# Altium PCB mpll31.PcbDoc (part 3 of 4)
Units mil, origin at the board's own origin, x right, y up, seen from the top; angles counter-clockwise.
Board outline 3925 x 3925 mil, 2 copper layers (TopLayer, BottomLayer); 92 components, 107 nets, 905 pads, 24 vias.
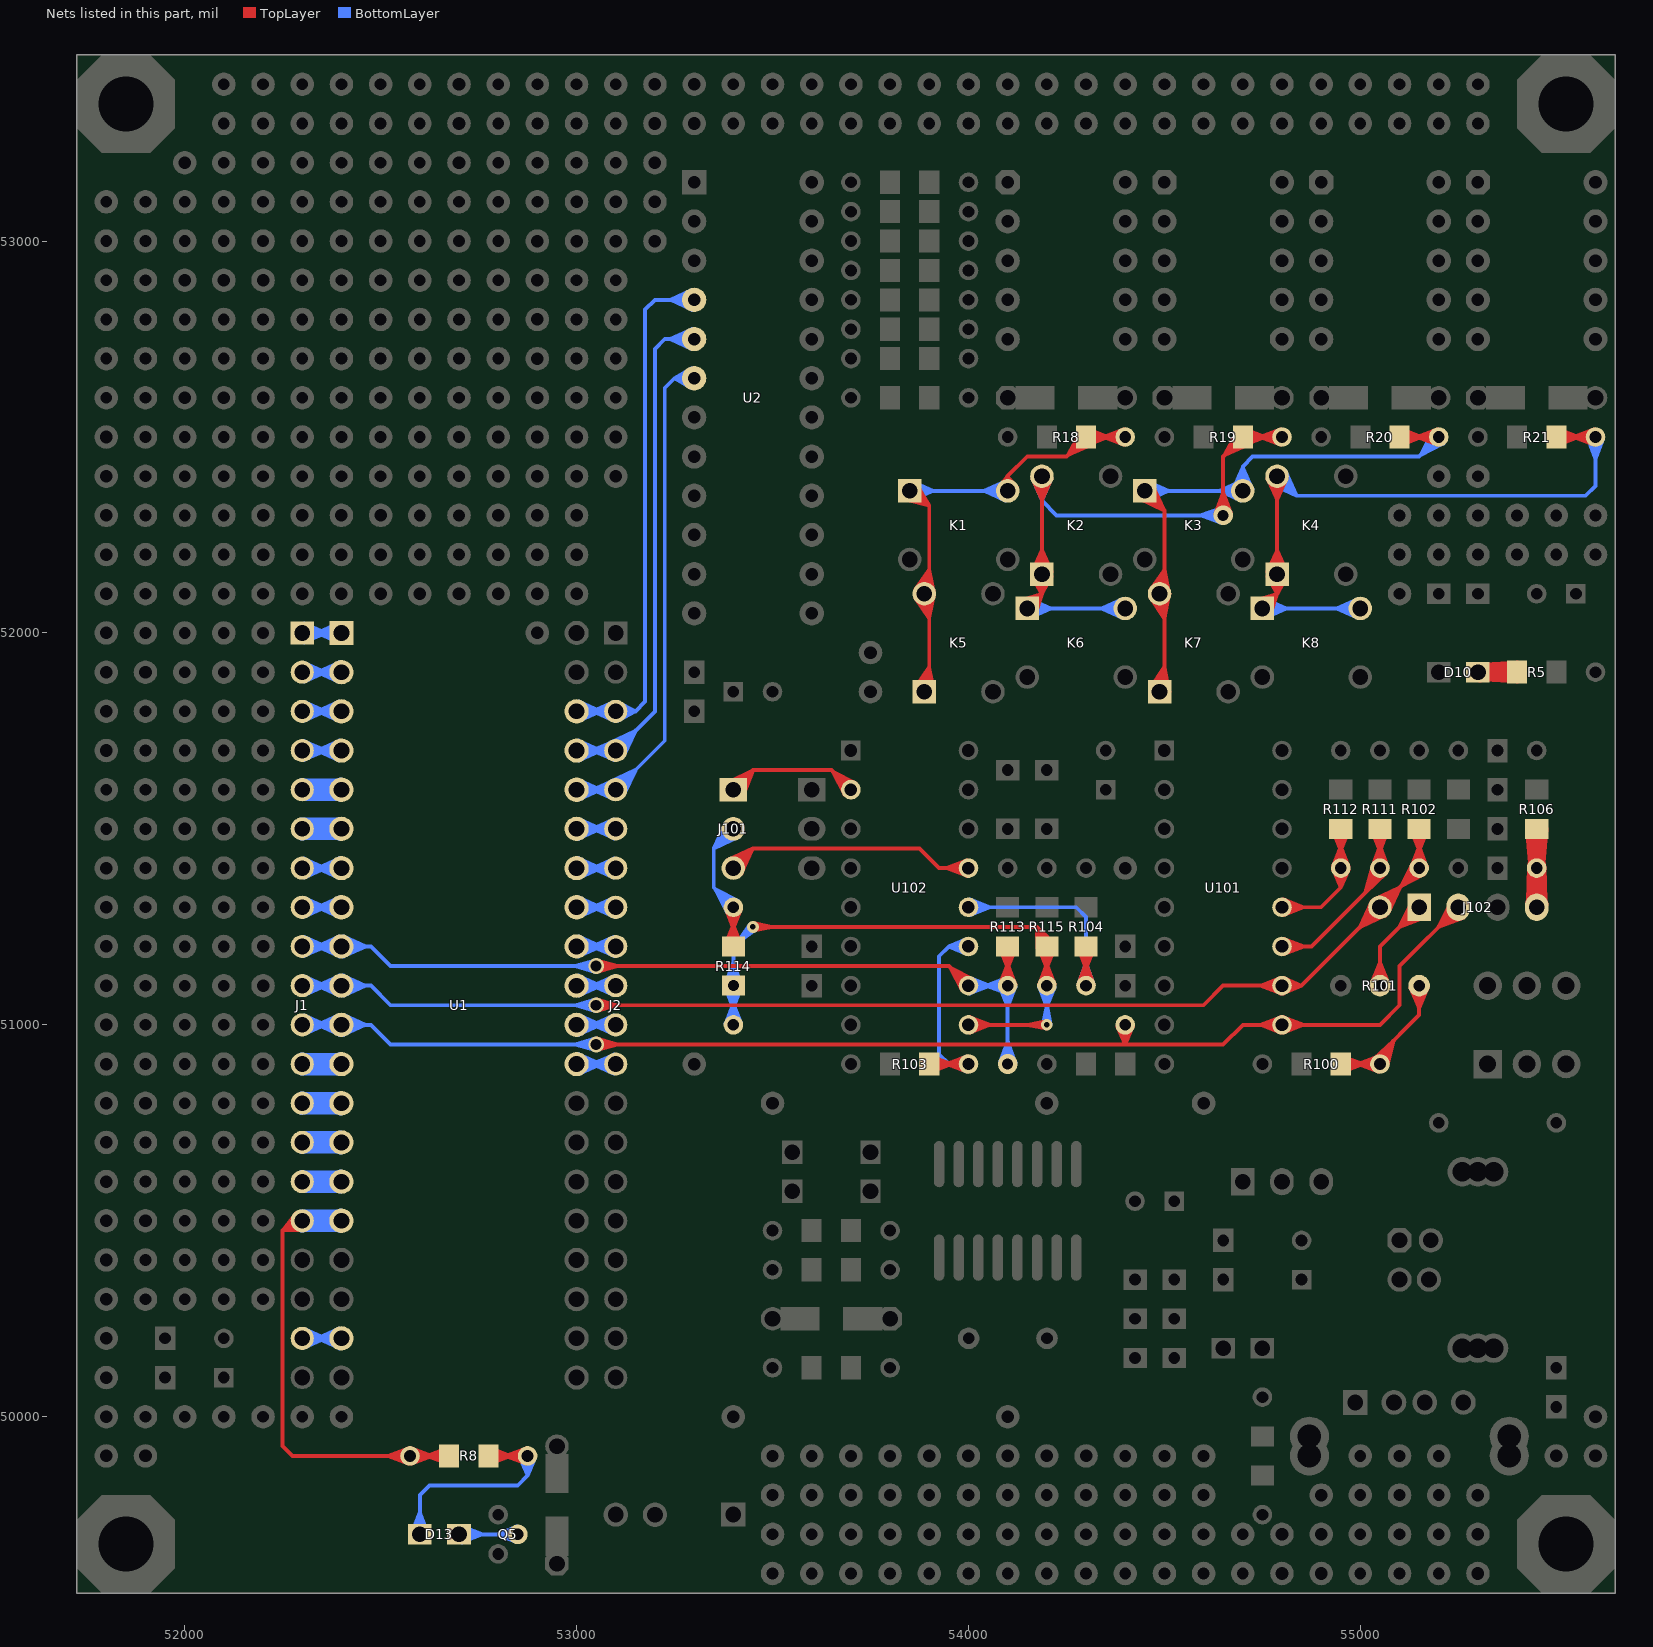
[diagram p3: the nets of this part, all layers, seen from the top]

## Via types
v1: diameter 50, hole 28, TopLayer to BottomLayer, 12 vias
v2: diameter 30, hole 14, TopLayer to BottomLayer, 8 vias
v3: diameter 40, hole 28, TopLayer to BottomLayer, 4 vias

## Nets (pads, with @x,y where several pads share a name; then routed paths per layer and width w, separated by ;. In a path a pad name is that pad's centre, name@x,y a point inside that pad or via, vN(x,y) a via of type N, cw(c..) or ccw(c..) an arc to the next point about the centre after c; other vN are vias at no path point) (continued)
NetD10_2: D10.2 R5.2 R5.4 | length 5082.1
  TopLayer w20: D10.2@55301.24,51885.05 R5.4@55389.2,51899.85 ; D10.2@55301.24,51914.95 R5.4@55389.2,51900.15 ; D10.2@55304,51900 R5.4@55390,51900 ; D10.2@55305.49,51884.07 R5.4@55390,51900 ; D10.2@55305.49,51915.93 R5.4@55390,51900 ; R5.4@55396.74,51888.69 D10.2@55315.14,51914.11 ; R5.4@55396.74,51911.31 D10.2@55315.14,51885.89 ; R5.4@55400.44,51880.48 D10.2@55315.14,51885.89 ; R5.4@55400.44,51919.52 D10.2@55315.14,51914.11 ; D10.2@55300,51900 R5.4@55389.2,51900.15 ; D10.2@55300,51900 R5.4@55385,51900 ; D10.2@55300,51900 R5.4@55389.2,51899.85 ; D10.2@55300,51900 R5.4@55400,51900 ; D10.2@55301.29,51885.06 R5.4@55389.2,51900.15 ; D10.2@55301.32,51885.06 R5.4@55385,51900 ; D10.2@55301.32,51885.06 R5.4@55385,51900 ; D10.2@55301.32,51914.94 R5.4@55385,51900 ; D10.2@55301.29,51914.94 R5.4@55389.2,51899.85 ; D10.2@55301.32,51914.94 R5.4@55385,51900 ; D10.2@55314.41,51900 R5.4@55400,51900 ; D10.2@55314.41,51900 R5.4@55398.58,51915.53 ; D10.2@55314.41,51900 R5.4@55398.58,51884.47 ; D10.2@55314.41,51900 R5.4@55398.58,51915.53 ; D10.2@55314.41,51900 R5.4@55398.58,51884.47 ; D10.2@55314.41,51900.02 R5.4@55400,51900 ; D10.2@55314.41,51900.02 R5.4@55398.58,51915.53 ; D10.2@55314.41,51900.02 R5.4@55398.58,51884.47 ; D10.2@55314.41,51900 R5.4@55400,51900 ; D10.2@55314.41,51900 R5.4@55398.58,51915.53 ; D10.2@55314.41,51900 R5.4@55398.58,51884.47 ; D10.2@55314.41,51899.98 R5.4@55400,51900 ; D10.2@55314.41,51899.98 R5.4@55398.58,51915.53 ; D10.2@55314.41,51899.98 R5.4@55398.58,51884.47 ; D10.2@55314.83,51887.47 R5.4@55400,51896.06 ; D10.2@55314.83,51887.47 55397.03,51911.37 D10.2@55314.83,51887.47 ; D10.2@55314.83,51887.47 R5.4@55400.15,51880.47 ; D10.2@55314.83,51887.47 R5.4@55400,51896.06 ; D10.2@55314.83,51887.47 R5.4@55400.15,51880.47 ; D10.2@55314.83,51912.53 R5.4@55400,51903.94 ; D10.2@55314.83,51912.53 R5.4@55400.15,51919.53 ; D10.2@55314.83,51912.53 55397.03,51888.63 D10.2@55314.83,51912.53 ; D10.2@55314.83,51912.53 R5.4@55400,51903.94 ; D10.2@55314.83,51912.53 R5.4@55400.15,51919.53 ; D10.2@55314.96,51887.4 R5.4@55400,51896.06 ; D10.2@55314.96,51887.4 55397.01,51911.36 D10.2@55314.99,51887.36 ; D10.2@55314.96,51887.4 R5.4@55400.16,51880.47 ; D10.2@55314.96,51912.6 R5.4@55400,51903.94 ; D10.2@55314.96,51912.6 R5.4@55400.16,51919.53 ; D10.2@55314.96,51912.6 55397.01,51888.64 D10.2@55314.99,51912.64 ; D10.2@55314.99,51887.36 R5.4@55400,51896.06 ; D10.2@55314.99,51887.36 R5.4@55400.17,51880.47 ; D10.2@55314.99,51912.64 R5.4@55400,51903.94 ; D10.2@55314.99,51912.64 R5.4@55400.17,51919.53 ; D10.2@55315.14,51885.89 R5.4@55400,51896.06 ; D10.2@55315.14,51914.11 R5.4@55400,51903.94
NetD13_1: D13.1 Q5.2 | length 650
  BottomLayer w10: D13.1@52700,49700 Q5.2@52850,49700 ; D13.1@52704,49700 52760,49700 ; D13.1@52705.08,49689.05 52760,49700 ; D13.1@52705.08,49710.95 52760,49700 ; D13.1@52707.94,49679.37 52760,49700 ; D13.1@52707.94,49720.63 52760,49700 ; Q5.2@52846.36,49680.33 52795,49700 ; Q5.2@52846.36,49719.67 52795,49700 ; Q5.2@52849.09,49690.04 52795,49700 ; Q5.2@52849.09,49709.96 52795,49700
NetD13_2: D13.2 R8.1 R8.3 | length 1412.1
  TopLayer w10: R8.3@52775,49900 R8.1@52875,49900 ; R8.3@52776.01,49889.46 52830.59,49900 ; R8.3@52776.01,49910.54 52830.59,49900 ; R8.3@52778.81,49879.77 52830.59,49900 ; R8.3@52778.81,49920.23 52830.59,49900 ; R8.1@52871.36,49880.33 52820,49900 ; R8.1@52871.36,49919.67 52820,49900 ; R8.1@52874.09,49890.04 52820,49900 ; R8.1@52874.09,49909.96 52820,49900
  BottomLayer w10: D13.2@52579.37,49703.94 52600,49756 ; D13.2@52589.05,49701.08 52600,49756 ; D13.2@52600,49700 52600,49800 52625,49825 52850,49825 52875,49850 ; D13.2@52610.95,49701.08 52600,49756 ; D13.2@52620.63,49703.94 52600,49756 ; R8.1@52855.4,49896 52875,49850 ; R8.1@52865.05,49899 52875,49850 ; R8.1@52875,49900 52875,49850 ; R8.1@52884.95,49899 52875,49850 ; R8.1@52894.6,49896 52875,49850
NetJ1_19: J1.19 U1.19 | length 704.1
  BottomLayer w10: J1.19@52300,50200 U1.19@52400,50200 ; J1.19@52301.77,50185.58 52359.53,50200 ; J1.19@52301.77,50214.42 52359.53,50200 ; J1.19@52305.05,50176 52359.53,50200 ; J1.19@52305.05,50224 52359.53,50200 ; U1.19@52394.46,50174.6 52339,50200 ; U1.19@52394.46,50225.4 52339,50200 ; U1.19@52397.9,50184.14 52339,50200 ; U1.19@52397.9,50215.86 52339,50200 ; U1.19@52399.7,50194.01 52339,50200 ; U1.19@52399.7,50205.99 52339,50200
NetJ2_10: J2.10 U1.31 | length 704.1
  BottomLayer w10: U1.31@53000,51100 J2.10@53100,51100 ; U1.31@53000.3,51094.01 53061,51100 ; U1.31@53000.3,51105.99 53061,51100 ; U1.31@53002.1,51084.14 53061,51100 ; U1.31@53002.1,51115.86 53061,51100 ; U1.31@53005.54,51074.6 53061,51100 ; U1.31@53005.54,51125.4 53061,51100 ; J2.10@53094.95,51076 53040.47,51100 ; J2.10@53094.95,51124 53040.47,51100 ; J2.10@53098.23,51085.58 53040.47,51100 ; J2.10@53098.23,51114.42 53040.47,51100
NetJ2_11: J2.11 U1.30 | length 704.1
  BottomLayer w10: U1.30@53000,51000 J2.11@53100,51000 ; U1.30@53000.3,50994.01 53061,51000 ; U1.30@53000.3,51005.99 53061,51000 ; U1.30@53002.1,50984.14 53061,51000 ; U1.30@53002.1,51015.86 53061,51000 ; U1.30@53005.54,50974.6 53061,51000 ; U1.30@53005.54,51025.4 53061,51000 ; J2.11@53094.95,50976 53040.47,51000 ; J2.11@53094.95,51024 53040.47,51000 ; J2.11@53098.23,50985.58 53040.47,51000 ; J2.11@53098.23,51014.42 53040.47,51000
NetJ2_12: J2.12 U1.29 | length 704.1
  BottomLayer w10: U1.29@53000,50900 J2.12@53100,50900 ; U1.29@53000.3,50894.01 53061,50900 ; U1.29@53000.3,50905.99 53061,50900 ; U1.29@53002.1,50884.14 53061,50900 ; U1.29@53002.1,50915.86 53061,50900 ; U1.29@53005.54,50874.6 53061,50900 ; U1.29@53005.54,50925.4 53061,50900 ; J2.12@53094.95,50876 53040.47,50900 ; J2.12@53094.95,50924 53040.47,50900 ; J2.12@53098.23,50885.58 53040.47,50900 ; J2.12@53098.23,50914.42 53040.47,50900
NetJ101_1: J101.1 U102.2 | length 1004.5
  TopLayer w10: J101.1@53389.85,51619.89 53450,51650 ; J101.1@53395.04,51611.21 53450,51650 ; J101.1@53400,51600 53450,51650 ; J101.1@53405,51600 53450,51650 ; J101.1@53417.2,51591.27 53450,51650 ; J101.1@53426.37,51587.02 53450,51650 ; U102.2@53683.86,51588.19 53653.79,51646.21 ; U102.2@53692.41,51593.49 53653.79,51646.21 ; U102.2@53706.51,51607.59 53653.79,51646.21 ; U102.2@53711.81,51616.14 53653.79,51646.21 ; 53450,51650 53650,51650 U102.2@53700,51600 53653.79,51646.21
NetJ101_2: J101.2 R114.1 R114.3 | length 1328
  TopLayer w10: R114.3@53379.77,51203.81 53400,51255.59 ; R114.1@53380.33,51296.36 53400,51245 ; R114.3@53389.46,51201.01 53400,51255.59 ; R114.1@53390.04,51299.09 53400,51245 ; R114.3@53400,51200 R114.1@53400,51300 ; R114.1@53409.96,51299.09 53400,51245 ; R114.3@53410.54,51201.01 53400,51255.59 ; R114.1@53419.67,51296.36 53400,51245 ; R114.3@53420.23,51203.81 53400,51255.59
  BottomLayer w10: J101.2@53379.48,51514.27 53350,51450 ; R114.1@53383.86,51288.19 53353.79,51346.21 ; J101.2@53388.33,51509.42 53350,51450 ; R114.1@53392.41,51293.49 53353.79,51346.21 ; R114.1@53400,51300 53350,51350 53350,51450 ; J101.2@53400,51500 53350,51450 ; R114.1@53406.51,51307.59 53353.79,51346.21 ; J101.2@53409.42,51488.33 53350,51450 ; R114.1@53411.81,51316.14 53353.79,51346.21 ; J101.2@53414.27,51479.48 53350,51450
NetJ101_3: J101.3 U102.13 | length 1144.3
  TopLayer w10: J101.3@53385.73,51420.52 53450,51450 ; J101.3@53390.58,51411.67 53450,51450 ; J101.3@53400,51400 53450,51450 ; J101.3@53411.67,51390.58 53450,51450 ; J101.3@53420.52,51385.73 53450,51450 ; U102.13@53996.36,51380.33 53945,51400 ; U102.13@53996.36,51419.67 53945,51400 ; U102.13@53999.09,51390.04 53945,51400 ; U102.13@53999.09,51409.96 53945,51400 ; U102.13@54000,51400 53925,51400 53875,51450 53450,51450
NetJ102_1: J102.1 R101.2 | length 816.3
  TopLayer w10: R101.2@55027.93,51104.4 55050,51157.5 ; R101.2@55037.57,51101.36 55050,51157.5 ; R101.2@55050,51100 55050,51200 J102.1@55150,51300 ; R101.2@55062.43,51101.36 55050,51157.5 ; R101.2@55072.07,51104.4 55050,51157.5 ; J102.1@55130.17,51310.22 55098.79,51248.79 ; J102.1@55138.8,51304.98 55098.79,51248.79 ; J102.1@55150,51295 55098.79,51248.79 ; J102.1@55158.78,51282.84 55098.79,51248.79 ; J102.1@55163.11,51273.71 55098.79,51248.79
NetJ102_4: J102.4 R106.1 R106.3 | length 2263.3
  TopLayer w20: J102.4@55430.12,51307.22 R106.1@55450,51395 ; R106.3@55430.47,51500.15 R106.1@55437.47,51414.83 ; R106.3@55434.47,51498.58 55450,51414.41 R106.3@55465.53,51498.58 ; R106.1@55435.06,51401.32 55450,51485 R106.1@55464.94,51401.32 ; R106.1@55435.11,51401.83 J102.4@55432.18,51316.29 ; R106.1@55435.66,51395.6 J102.4@55467.82,51316.29 ; R106.3@55438.63,51497.03 R106.1@55462.53,51414.83 ; R106.3@55446.06,51500 R106.1@55437.47,51414.83 ; J102.4@55450,51300 R106.1@55450,51400 ; J102.4@55450,51305 R106.1@55450,51395 ; R106.3@55450,51500 R106.1@55450,51400 ; R106.3@55453.94,51500 R106.1@55462.53,51414.83 ; R106.3@55461.37,51497.03 R106.1@55437.47,51414.83 ; R106.1@55464.34,51395.6 J102.4@55432.18,51316.29 ; R106.1@55464.89,51401.83 J102.4@55467.82,51316.29 ; R106.3@55469.53,51500.15 R106.1@55462.53,51414.83 ; J102.4@55469.88,51307.22 R106.1@55450,51395 ; J102.4@55432.18,51316.29 R106.1@55450,51400 ; J102.4@55450,51315 R106.1@55450,51400 ; J102.4@55450,51315 55435.06,51398.68 J102.4@55450,51315 ; J102.4@55450,51315 55464.94,51398.68 J102.4@55450,51315 ; R106.1@55450,51400 J102.4@55467.82,51316.29
NetK1_1: K1.1 K1.4 K5.1 K5.4 R18.2 R18.4 | length 3820.6
  TopLayer w10: K1.1@53839.3,52339.9 53900,52325 ; K1.1@53842.5,52349.51 53900,52325 ; K1.1@53860.38,52373.33 53900,52325 ; K5.1@53864.44,51859.66 53900,51912.2 ; K5.4@53864.46,52090.31 53900,52038.05 ; K5.4@53864.46,52109.7 53900,52161.9 ; K1.1@53868.7,52379.1 53900,52325 ; K5.1@53873.25,51854.67 53900,51912.2 ; K5.4@53873.25,52095.31 53900,52038.05 ; K5.4@53873.25,52104.69 53900,52161.9 ; K5.1@53887.5,51850 53900,51912.2 ; K5.1@53900,51850 53900,52325 ; K5.1@53902.45,51848.8 53900,51912.2 ; K5.4@53902.45,52098.8 53900,52161.9 ; K5.4@53902.45,52101.2 53900,52038.05 ; K5.1@53912.5,51850 53900,51912.2 ; K1.4@54076.43,52370.83 54100,52400 ; K1.4@54085.3,52365.5 54100,52400 ; K1.4@54100,52362.5 54100,52400 ; K1.4@54114.7,52365.5 54100,52400 ; K1.4@54123.57,52370.83 54100,52400 ; R18.4@54283.81,52508.79 54253.2,52453.2 ; R18.4@54292.22,52503.25 54253.2,52453.2 ; R18.4@54300,52496.06 54253.2,52453.2 ; R18.4@54301.01,52489.46 54355.59,52500 ; R18.4@54301.01,52510.54 54355.59,52500 ; R18.4@54303.81,52479.77 54355.59,52500 ; R18.4@54303.81,52520.23 54355.59,52500 ; R18.4@54306.48,52487.68 54253.2,52453.2 ; R18.4@54311.26,52478.82 54253.2,52453.2 ; R18.2@54396.36,52480.33 54345,52500 ; R18.2@54396.36,52519.67 54345,52500 ; R18.2@54399.09,52490.04 54345,52500 ; R18.2@54399.09,52509.96 54345,52500 ; R18.2@54400,52500 R18.4@54300,52500 54250,52450 54150,52450 54100,52400 ; 53900,52038.05 K5.4@53887.5,52100 53900,52161.9 ; 53900,52038.05 53912.5,52100 53900,52161.9 ; 53900,52325 K1.1@53850,52362.5 53862.5,52362.5 53900,52325
  BottomLayer w10: K1.1@53850,52362.5 K1.4@54100,52362.5 ; K1.1@53851.88,52347.62 53910,52362.5 ; K1.1@53851.88,52377.38 53910,52362.5 ; K1.1@53855.21,52338.05 53910,52362.5 ; K1.1@53855.21,52386.95 53910,52362.5 ; K1.4@54094.79,52338.05 54040,52362.5 ; K1.4@54094.79,52386.95 54040,52362.5 ; K1.4@54098.12,52347.62 54040,52362.5 ; K1.4@54098.12,52377.38 54040,52362.5
NetK2_1: K2.1 K2.4 K6.1 K6.4 R19.2 R19.4 | length 4308.1
  TopLayer w10: K6.1@54136.99,52083.85 54187.5,52100 ; K6.1@54141,52074.5 54187.5,52100 ; K6.1@54150,52062.5 54187.5,52100 ; K6.1@54162,52053.5 54187.5,52100 ; K2.1@54163.05,52155.21 54187.5,52210 ; K2.4@54163.05,52394.79 54187.5,52340 ; K2.1@54163.29,52143.75 54187.5,52100 ; K6.1@54171.35,52049.49 54187.5,52100 ; K2.1@54172.62,52151.88 54187.5,52210 ; K2.4@54172.62,52398.12 54187.5,52340 ; K2.1@54172.67,52147.75 54187.5,52100 ; K2.4@54187.5,52400 K2.1@54187.5,52150 54187.5,52100 ; K2.1@54202.33,52147.75 54187.5,52100 ; K2.1@54202.38,52151.88 54187.5,52210 ; K2.4@54202.38,52398.12 54187.5,52340 ; K2.1@54211.71,52143.75 54187.5,52100 ; K2.1@54211.95,52155.21 54187.5,52210 ; K2.4@54211.95,52394.79 54187.5,52340 ; v1@54630.29,52303.39 54650,52359 ; v1@54640.04,52300.85 54650,52359 ; v1(54650,52300) 54650,52450 R19.4@54700,52500 R19.2@54800,52500 ; v1@54659.96,52300.85 54650,52359 ; v1@54669.71,52303.39 54650,52359 ; R19.4@54683.81,52508.79 54653.2,52453.2 ; R19.4@54692.22,52503.25 54653.2,52453.2 ; R19.4@54700,52496.06 54653.2,52453.2 ; R19.4@54701.01,52489.46 54755.59,52500 ; R19.4@54701.01,52510.54 54755.59,52500 ; R19.4@54703.81,52479.77 54755.59,52500 ; R19.4@54703.81,52520.23 54755.59,52500 ; R19.4@54706.48,52487.68 54653.2,52453.2 ; R19.4@54711.26,52478.82 54653.2,52453.2 ; R19.2@54796.36,52480.33 54745,52500 ; R19.2@54796.36,52519.67 54745,52500 ; R19.2@54799.09,52490.04 54745,52500 ; R19.2@54799.09,52509.96 54745,52500
  BottomLayer w10: K6.1@54150,52062.5 K6.4@54400,52062.5 ; K6.1@54151.88,52047.62 54210,52062.5 ; K6.1@54151.88,52077.38 54210,52062.5 ; K6.1@54155.21,52038.05 54210,52062.5 ; K6.1@54155.21,52086.95 54210,52062.5 ; K2.4@54163.05,52394.79 54187.5,52340 ; K2.4@54172.62,52398.12 54187.5,52340 ; K2.4@54187.5,52400 54187.5,52337.5 54225,52300 v1(54650,52300) ; K2.4@54202.38,52398.12 54187.5,52340 ; K2.4@54211.95,52394.79 54187.5,52340 ; K6.4@54394.79,52038.05 54340,52062.5 ; K6.4@54394.79,52086.95 54340,52062.5 ; K6.4@54398.12,52047.62 54340,52062.5 ; K6.4@54398.12,52077.38 54340,52062.5 ; v1@54646.61,52280.29 54591,52300 ; v1@54646.61,52319.71 54591,52300 ; v1@54649.15,52290.04 54591,52300 ; v1@54649.15,52309.96 54591,52300
NetK3_1: K3.1 K3.4 K7.1 K7.4 R20.2 R20.4 | length 4132.2
  TopLayer w10: K3.1@54435.73,52341.98 54500,52312.5 ; K3.1@54440.58,52350.83 54500,52312.5 ; K3.1@54450,52362.5 54500,52312.5 ; K3.1@54461.67,52371.92 54500,52312.5 ; K7.1@54464.44,51859.66 54500,51912.2 ; K7.4@54464.46,52090.31 54500,52038.05 ; K7.4@54464.46,52109.71 54500,52161.86 ; K3.1@54470.52,52376.77 54500,52312.5 ; K7.1@54473.25,51854.67 54500,51912.2 ; K7.4@54473.25,52095.31 54500,52038.05 ; K7.4@54473.25,52104.7 54500,52161.86 ; K7.1@54487.5,51850 54500,51912.2 ; K7.1@54500,51850 54500,52312.5 ; K7.1@54502.45,51848.8 54500,51912.2 ; K7.4@54502.45,52098.8 54500,52161.86 ; K7.4@54502.45,52101.2 54500,52038.05 ; K7.1@54512.5,51850 54500,51912.2 ; R20.4@55100,52500 R20.2@55200,52500 ; R20.4@55101.01,52489.46 55155.59,52500 ; R20.4@55101.01,52510.54 55155.59,52500 ; R20.4@55103.81,52479.77 55155.59,52500 ; R20.4@55103.81,52520.23 55155.59,52500 ; R20.2@55196.36,52480.33 55145,52500 ; R20.2@55196.36,52519.67 55145,52500 ; R20.2@55199.09,52490.04 55145,52500 ; R20.2@55199.09,52509.96 55145,52500 ; 54500,52038.05 K7.4@54487.5,52100 54500,52161.86 ; 54500,52038.05 54512.5,52100 54500,52161.86
  BottomLayer w10: K3.1@54450,52362.5 K3.4@54700,52362.5 54700,52425 54725,52450 55150,52450 R20.2@55200,52500 ; K3.1@54451.88,52347.62 54510,52362.5 ; K3.1@54451.88,52377.38 54510,52362.5 ; K3.1@54455.21,52338.05 54510,52362.5 ; K3.1@54455.21,52386.95 54510,52362.5 ; K3.4@54675.55,52367.71 54700,52422.5 ; K3.4@54685.12,52364.38 54700,52422.5 ; K3.4@54694.79,52338.05 54640,52362.5 ; K3.4@54694.79,52386.95 54640,52362.5 ; K3.4@54698.12,52347.62 54640,52362.5 ; K3.4@54698.12,52377.38 54640,52362.5 ; K3.4@54714.88,52364.38 54700,52422.5 ; K3.4@54724.45,52367.71 54700,52422.5 ; R20.2@55183.86,52511.81 55153.79,52453.79 ; R20.2@55192.41,52506.51 55153.79,52453.79 ; R20.2@55206.51,52492.41 55153.79,52453.79 ; R20.2@55211.81,52483.86 55153.79,52453.79
NetK4_1: K4.1 K4.4 K8.1 K8.4 R21.2 R21.4 | length 3988.9
  TopLayer w10: K8.1@54736.99,52083.85 54787.5,52100 ; K8.1@54741,52074.5 54787.5,52100 ; K8.1@54750,52062.5 54787.5,52100 ; K8.1@54762,52053.5 54787.5,52100 ; K4.1@54763.05,52155.21 54787.5,52210 ; K4.4@54763.05,52394.79 54787.5,52340 ; K4.1@54763.29,52143.75 54787.5,52100 ; K8.1@54771.35,52049.49 54787.5,52100 ; K4.1@54772.62,52151.88 54787.5,52210 ; K4.4@54772.62,52398.12 54787.5,52340 ; K4.1@54772.67,52147.75 54787.5,52100 ; K4.4@54787.5,52400 K4.1@54787.5,52150 54787.5,52100 ; K4.1@54802.33,52147.75 54787.5,52100 ; K4.1@54802.38,52151.88 54787.5,52210 ; K4.4@54802.38,52398.12 54787.5,52340 ; K4.1@54811.71,52143.75 54787.5,52100 ; K4.1@54811.95,52155.21 54787.5,52210 ; K4.4@54811.95,52394.79 54787.5,52340 ; R21.4@55500,52500 R21.2@55600,52500 ; R21.4@55501.01,52489.46 55555.59,52500 ; R21.4@55501.01,52510.54 55555.59,52500 ; R21.4@55503.81,52479.77 55555.59,52500 ; R21.4@55503.81,52520.23 55555.59,52500 ; R21.2@55596.36,52480.33 55545,52500 ; R21.2@55596.36,52519.67 55545,52500 ; R21.2@55599.09,52490.04 55545,52500 ; R21.2@55599.09,52509.96 55545,52500
  BottomLayer w10: K8.1@54750,52062.5 K8.4@55000,52062.5 ; K8.1@54751.88,52047.62 54810,52062.5 ; K8.1@54751.88,52077.38 54810,52062.5 ; K8.1@54755.21,52038.05 54810,52062.5 ; K8.1@54755.21,52086.95 54810,52062.5 ; K4.4@54773.23,52379.48 54837.5,52350 ; K4.4@54778.08,52388.33 54837.5,52350 ; K4.4@54787.5,52400 54837.5,52350 ; K4.4@54799.17,52409.42 54837.5,52350 ; K4.4@54808.02,52414.27 54837.5,52350 ; K8.4@54994.79,52038.05 54940,52062.5 ; K8.4@54994.79,52086.95 54940,52062.5 ; K8.4@54998.12,52047.62 54940,52062.5 ; K8.4@54998.12,52077.38 54940,52062.5 ; R21.2@55580.33,52496.36 55600,52445 ; R21.2@55590.04,52499.09 55600,52445 ; R21.2@55600,52500 55600,52375 55575,52350 54837.5,52350 ; R21.2@55609.96,52499.09 55600,52445 ; R21.2@55619.67,52496.36 55600,52445
NetR100_1: R100.1 R100.3 R101.3 | length 1421
  TopLayer w10: R100.3@54950,50900 R100.1@55050,50900 ; R100.3@54951.01,50889.46 55005.59,50900 ; R100.3@54951.01,50910.54 55005.59,50900 ; R100.3@54953.81,50879.77 55005.59,50900 ; R100.3@54953.81,50920.23 55005.59,50900 ; R100.1@55034.37,50912.47 55085.36,50960.36 ; R100.1@55041.75,50905.66 55085.36,50960.36 ; R100.1@55046.36,50880.33 54995,50900 ; R100.1@55046.36,50919.67 54995,50900 ; R100.1@55049.09,50890.04 54995,50900 ; R100.1@55049.09,50909.96 54995,50900 ; R100.1@55058.97,50895.58 55085.36,50960.36 ; R100.1@55068.53,50892.46 55085.36,50960.36 ; R101.3@55127.93,51095.6 55150,51042.5 ; R101.3@55137.57,51098.64 55150,51042.5 ; R101.3@55162.43,51098.64 55150,51042.5 ; R101.3@55172.07,51095.6 55150,51042.5 ; R100.1@55050,50900 55085.36,50960.36 ; R100.1@55050,50900 55050,50925 55150,51025 R101.3@55150,51100 55150,51042.5
NetR103_2: R103.2 R103.4 U102.11 | length 1363.1
  TopLayer w10: R103.4@53900,50900 R103.2@54000,50900 ; R103.4@53901.01,50889.46 53955.59,50900 ; R103.4@53901.01,50910.54 53955.59,50900 ; R103.4@53903.81,50879.77 53955.59,50900 ; R103.4@53903.81,50920.23 53955.59,50900 ; R103.2@53996.36,50880.33 53945,50900 ; R103.2@53996.36,50919.67 53945,50900 ; R103.2@53999.09,50890.04 53945,50900 ; R103.2@53999.09,50909.96 53945,50900
  BottomLayer w10: R103.2@53996,50880.4 53950,50900 ; R103.2@53996,50919.6 53950,50900 ; U102.11@53996,51180.4 53950,51200 ; U102.11@53996,51219.6 53950,51200 ; R103.2@53999,50890.05 53950,50900 ; R103.2@53999,50909.95 53950,50900 ; U102.11@53999,51190.05 53950,51200 ; U102.11@53999,51209.95 53950,51200 ; R103.2@54000,50900 53950,50900 ; U102.11@54000,51200 53950,51200 ; 53950,50900 53925,50925 53925,51175 53950,51200
NetR104_2: R104.2 R104.4 U102.12 | length 1467.7
  TopLayer w10: R104.4@54279.77,51196.19 54300,51144.41 ; R104.2@54280.33,51103.64 54300,51155 ; R104.4@54289.46,51198.99 54300,51144.41 ; R104.2@54290.04,51100.91 54300,51155 ; R104.2@54300,51100 R104.4@54300,51200 ; R104.2@54309.96,51100.91 54300,51155 ; R104.4@54310.54,51198.99 54300,51144.41 ; R104.2@54319.67,51103.64 54300,51155 ; R104.4@54320.23,51196.19 54300,51144.41
  BottomLayer w10: U102.12@54000,51300 54275,51300 54300,51275 R104.2@54300,51100 ; U102.12@54000.91,51290.04 54055,51300 ; U102.12@54000.91,51309.96 54055,51300 ; U102.12@54003.64,51280.33 54055,51300 ; U102.12@54003.64,51319.67 54055,51300 ; R104.2@54280.33,51103.64 54300,51155 ; R104.2@54290.04,51100.91 54300,51155 ; R104.2@54309.96,51100.91 54300,51155 ; R104.2@54319.67,51103.64 54300,51155
NetR111_2: R111.2 R111.4 U101.11 | length 1443.7
  TopLayer w10: U101.11@54800,51200 54875,51200 55050,51375 ; U101.11@54800.91,51190.04 54855,51200 ; U101.11@54800.91,51209.96 54855,51200 ; U101.11@54803.64,51180.33 54855,51200 ; U101.11@54803.64,51219.67 54855,51200 ; R111.4@55029.77,51496.19 55050,51444.41 ; R111.2@55030.33,51403.64 55050,51455 ; R111.2@55031.55,51407.73 55013.32,51338.32 ; R111.4@55039.46,51498.99 55050,51444.41 ; R111.2@55040.04,51400.91 55050,51455 ; R111.2@55041.07,51404.5 55013.32,51338.32 ; R111.4@55050,51500 R111.2@55050,51400 55013.32,51338.32 ; R111.2@55058.22,51394.3 55013.32,51338.32 ; R111.2@55059.96,51400.91 55050,51455 ; R111.4@55060.54,51498.99 55050,51444.41 ; R111.2@55065.6,51387.48 55013.32,51338.32 ; R111.2@55069.67,51403.64 55050,51455 ; R111.4@55070.23,51496.19 55050,51444.41
NetR112_2: R112.2 R112.4 U101.12 | length 1233.1
  TopLayer w10: U101.12@54800,51300 54900,51300 54950,51350 ; U101.12@54800.91,51290.04 54855,51300 ; U101.12@54800.91,51309.96 54855,51300 ; U101.12@54803.64,51280.33 54855,51300 ; U101.12@54803.64,51319.67 54855,51300 ; R112.4@54929.77,51496.19 54950,51444.41 ; R112.2@54930.33,51403.64 54950,51455 ; R112.2@54930.4,51396 54950,51350 ; R112.4@54939.46,51498.99 54950,51444.41 ; R112.2@54940.05,51399 54950,51350 ; R112.2@54940.04,51400.91 54950,51455 ; R112.4@54950,51500 R112.2@54950,51400 ; R112.2@54959.95,51399 54950,51350 ; R112.2@54959.96,51400.91 54950,51455 ; R112.4@54960.54,51498.99 54950,51444.41 ; R112.2@54969.6,51396 54950,51350 ; R112.2@54969.67,51403.64 54950,51455 ; R112.4@54970.23,51496.19 54950,51444.41 ; 54950,51350 R112.2@54950,51400 ; 54950,51350 R112.2@54950,51400
NetR114_2: R114.2 R114.4 R115.2 R115.4 U102.9 | length 3765
  TopLayer w10: v2(53450,51250) 54175,51250 ; v2@53451.02,51240.05 53499,51250 v2@53451.02,51259.95 ; U102.9@54000,51000 v2(54200,51000) ; U102.9@54000.91,50990.04 54055,51000 ; U102.9@54000.91,51009.96 54055,51000 ; U102.9@54003.64,50980.33 54055,51000 ; U102.9@54003.64,51019.67 54055,51000 ; R115.4@54175.92,51195.75 54175,51250 ; R115.4@54179.77,51196.19 54200,51144.41 ; R115.2@54180.33,51103.64 54200,51155 ; R115.4@54185.95,51196.86 54175,51250 ; R115.4@54189.46,51198.99 54200,51144.41 ; R115.2@54190.04,51100.91 54200,51155 ; R115.4@54196.06,51200 54175,51250 ; v2@54198.98,50990.05 54151,51000 v2@54198.98,51009.95 ; R115.2@54200,51100 54200,51225 54175,51250 ; R115.4@54200,51200 54200,51144.41 ; R115.4@54205.38,51205.04 54175,51250 ; R115.2@54209.96,51100.91 54200,51155 ; R115.4@54210.54,51198.99 54200,51144.41 ; R115.4@54213.18,51211.45 54175,51250 ; R115.2@54219.67,51103.64 54200,51155 ; R115.4@54220.23,51196.19 54200,51144.41
  BottomLayer w10: v1@53380.29,51096.61 53400,51041 ; v1@53380.29,51103.39 53400,51159 ; R114.2@53380.33,51003.64 53400,51055 ; R114.2@53390.04,51000.91 53400,51055 ; v1@53390.04,51099.15 53400,51041 ; v1@53390.04,51100.85 53400,51159 ; R114.2@53400,51000 v1(53400,51100) 53400,51200 v2(53450,51250) ; R114.2@53409.96,51000.91 53400,51055 ; v1@53409.96,51099.15 53400,51041 ; v1@53409.96,51100.85 53400,51159 ; R114.2@53419.67,51003.64 53400,51055 ; v1@53419.71,51096.61 53400,51041 ; v1@53419.71,51103.39 53400,51159 ; v2@53442.33,51256.42 53409.79,51209.79 v2@53456.42,51242.33 ; R115.2@54180.33,51096.36 54200,51045 ; v2@54190.05,51001.02 54200,51049 v2@54209.95,51001.02 ; R115.2@54190.04,51099.09 54200,51045 ; v2(54200,51000) R115.2@54200,51100 ; R115.2@54209.96,51099.09 54200,51045 ; R115.2@54219.67,51096.36 54200,51045
P00: J1.1 U1.1 | length 704.1
  BottomLayer w10: J1.1@52300,52000 U1.1@52400,52000 ; J1.1@52301.77,51985.58 52359.53,52000 ; J1.1@52301.77,52014.42 52359.53,52000 ; J1.1@52305.05,51976 52359.53,52000 ; J1.1@52305.05,52024 52359.53,52000 ; U1.1@52394.46,51974.6 52339,52000 ; U1.1@52394.46,52025.4 52339,52000 ; U1.1@52397.9,51984.14 52339,52000 ; U1.1@52397.9,52015.86 52339,52000 ; U1.1@52399.7,51994.01 52339,52000 ; U1.1@52399.7,52005.99 52339,52000
P01: J1.2 U1.2 | length 704.1
  BottomLayer w10: J1.2@52300,51900 U1.2@52400,51900 ; J1.2@52301.77,51885.58 52359.53,51900 ; J1.2@52301.77,51914.42 52359.53,51900 ; J1.2@52305.05,51876 52359.53,51900 ; J1.2@52305.05,51924 52359.53,51900 ; U1.2@52394.46,51874.6 52339,51900 ; U1.2@52394.46,51925.4 52339,51900 ; U1.2@52397.9,51884.14 52339,51900 ; U1.2@52397.9,51915.86 52339,51900 ; U1.2@52399.7,51894.01 52339,51900 ; U1.2@52399.7,51905.99 52339,51900
P02: J1.3 U1.3 | length 704.1
  BottomLayer w10: J1.3@52300,51800 U1.3@52400,51800 ; J1.3@52301.77,51785.58 52359.53,51800 ; J1.3@52301.77,51814.42 52359.53,51800 ; J1.3@52305.05,51776 52359.53,51800 ; J1.3@52305.05,51824 52359.53,51800 ; U1.3@52394.46,51774.6 52339,51800 ; U1.3@52394.46,51825.4 52339,51800 ; U1.3@52397.9,51784.14 52339,51800 ; U1.3@52397.9,51815.86 52339,51800 ; U1.3@52399.7,51794.01 52339,51800 ; U1.3@52399.7,51805.99 52339,51800
P03: J1.4 U1.4 | length 704.1
  BottomLayer w10: J1.4@52300,51700 U1.4@52400,51700 ; J1.4@52301.77,51685.58 52359.53,51700 ; J1.4@52301.77,51714.42 52359.53,51700 ; J1.4@52305.05,51676 52359.53,51700 ; J1.4@52305.05,51724 52359.53,51700 ; U1.4@52394.46,51674.6 52339,51700 ; U1.4@52394.46,51725.4 52339,51700 ; U1.4@52397.9,51684.14 52339,51700 ; U1.4@52397.9,51715.86 52339,51700 ; U1.4@52399.7,51694.01 52339,51700 ; U1.4@52399.7,51705.99 52339,51700
P04: J1.5 U1.5 | length 1002.6
  BottomLayer w20: J1.5@52298.05,51580.57 U1.5@52388.31,51581.32 ; J1.5@52298.05,51619.43 U1.5@52388.31,51618.68 ; J1.5@52302.13,51580.59 52389.53,51600 J1.5@52302.13,51619.41 ; J1.5@52306.08,51581.44 U1.5@52388.31,51618.68 ; J1.5@52306.08,51618.56 U1.5@52388.31,51581.32 ; U1.5@52397.58,51579.14 52309,51600 U1.5@52397.58,51620.86 ; U1.5@52400,51600 J1.5@52300,51600 ; J1.5@52300,51600 U1.5@52388.31,51618.68 ; J1.5@52300,51600 U1.5@52388.31,51581.32
P05: J1.6 U1.6 | length 1002.6
  BottomLayer w20: J1.6@52298.05,51480.57 U1.6@52388.31,51481.32 ; J1.6@52298.05,51519.43 U1.6@52388.31,51518.68 ; J1.6@52302.13,51480.59 52389.53,51500 J1.6@52302.13,51519.41 ; J1.6@52306.08,51481.44 U1.6@52388.31,51518.68 ; J1.6@52306.08,51518.56 U1.6@52388.31,51481.32 ; U1.6@52397.58,51479.14 52309,51500 U1.6@52397.58,51520.86 ; U1.6@52400,51500 J1.6@52300,51500 ; J1.6@52300,51500 U1.6@52388.31,51518.68 ; J1.6@52300,51500 U1.6@52388.31,51481.32
P06: J1.7 U1.7 | length 704.1
  BottomLayer w10: J1.7@52300,51400 U1.7@52400,51400 ; J1.7@52301.77,51385.58 52359.53,51400 ; J1.7@52301.77,51414.42 52359.53,51400 ; J1.7@52305.05,51376 52359.53,51400 ; J1.7@52305.05,51424 52359.53,51400 ; U1.7@52394.46,51374.6 52339,51400 ; U1.7@52394.46,51425.4 52339,51400 ; U1.7@52397.9,51384.14 52339,51400 ; U1.7@52397.9,51415.86 52339,51400 ; U1.7@52399.7,51394.01 52339,51400 ; U1.7@52399.7,51405.99 52339,51400
P07: J1.8 U1.8 | length 704.1
  BottomLayer w10: J1.8@52300,51300 U1.8@52400,51300 ; J1.8@52301.77,51285.58 52359.53,51300 ; J1.8@52301.77,51314.42 52359.53,51300 ; J1.8@52305.05,51276 52359.53,51300 ; J1.8@52305.05,51324 52359.53,51300 ; U1.8@52394.46,51274.6 52339,51300 ; U1.8@52394.46,51325.4 52339,51300 ; U1.8@52397.9,51284.14 52339,51300 ; U1.8@52397.9,51315.86 52339,51300 ; U1.8@52399.7,51294.01 52339,51300 ; U1.8@52399.7,51305.99 52339,51300
P10: J1.9 R113.1 R113.3 U1.9 U102.10 | length 4981.3
  TopLayer w10: v3(53050,51150) 53950,51150 U102.10@54000,51100 ; v3@53052.08,51135.15 53104,51150 v3@53052.08,51164.85 ; U102.10@53983.86,51088.19 53953.79,51146.21 ; U102.10@53992.41,51093.49 53953.79,51146.21 ; U102.10@54006.51,51107.59 53953.79,51146.21 ; U102.10@54011.81,51116.14 53953.79,51146.21 ; R113.3@54079.77,51196.19 54100,51144.41 ; R113.1@54080.33,51103.64 54100,51155 ; R113.3@54089.46,51198.99 54100,51144.41 ; R113.1@54090.04,51100.91 54100,51155 ; R113.1@54100,51100 R113.3@54100,51200 ; R113.1@54109.96,51100.91 54100,51155 ; R113.3@54110.54,51198.99 54100,51144.41 ; R113.1@54119.67,51103.64 54100,51155 ; R113.3@54120.23,51196.19 54100,51144.41
  BottomLayer w10: J1.9@52300,51200 U1.9@52400,51200 52475,51200 52525,51150 v3(53050,51150) 52996,51150 ; J1.9@52301.77,51185.58 52359.53,51200 ; J1.9@52301.77,51214.42 52359.53,51200 ; J1.9@52305.05,51176 52359.53,51200 ; J1.9@52305.05,51224 52359.53,51200 ; U1.9@52394.46,51174.6 52339,51200 ; U1.9@52394.46,51225.4 52339,51200 ; U1.9@52397.9,51184.14 52339,51200 ; U1.9@52397.9,51215.86 52339,51200 ; U1.9@52399.7,51194.01 52339,51200 ; U1.9@52399.7,51205.99 52339,51200 ; U1.9@52400.3,51194.01 52461,51200 ; U1.9@52400.3,51205.99 52461,51200 ; U1.9@52402.1,51184.14 52461,51200 ; U1.9@52402.1,51215.86 52461,51200 ; U1.9@52405.54,51174.6 52461,51200 ; U1.9@52405.54,51225.4 52461,51200 ; v3@53047.92,51135.15 52996,51150 ; v3@53047.92,51164.85 52996,51150 ; U102.10@54000,51100 R113.1@54100,51100 v1(54100,50900) ; U102.10@54000.91,51090.04 54055,51100 ; U102.10@54000.91,51109.96 54055,51100 ; U102.10@54003.64,51080.33 54055,51100 ; U102.10@54003.64,51119.67 54055,51100 ; v1@54080.29,50903.39 54100,50959 ; R113.1@54080.33,51096.36 54100,51045 ; v1@54090.04,50900.85 54100,50959 ; R113.1@54090.04,51099.09 54100,51045 ; R113.1@54096.36,51080.33 54045,51100 ; R113.1@54096.36,51119.67 54045,51100 ; R113.1@54099.09,51090.04 54045,51100 ; R113.1@54099.09,51109.96 54045,51100 ; v1@54109.96,50900.85 54100,50959 ; R113.1@54109.96,51099.09 54100,51045 ; R113.1@54119.67,51096.36 54100,51045 ; v1@54119.71,50903.39 54100,50959
P11: J1.10 pad.0@55050,51300 R102.2 R102.4 U1.10 U101.10 | length 6196.8
  TopLayer w10: v3(53050,51050) 54600,51050 54650,51100 U101.10@54800,51100 54850,51100 ; v3@53052.08,51035.15 53104,51050 v3@53052.08,51064.85 ; U101.10@54796.36,51080.33 54745,51100 ; U101.10@54796.36,51119.67 54745,51100 ; U101.10@54799.09,51090.04 54745,51100 ; U101.10@54799.09,51109.96 54745,51100 ; U101.10@54801,51090.05 54850,51100 ; U101.10@54801,51109.95 54850,51100 ; U101.10@54804,51080.4 54850,51100 ; U101.10@54804,51119.6 54850,51100 ; pad.0@55029.54,51314.36 54998.79,51248.79 ; pad.0@55035.64,51320.46 55101.21,51351.21 ; pad.0@55038.35,51309.45 54998.79,51248.79 ; pad.0@55040.55,51311.65 55101.21,51351.21 ; pad.0@55050,51300 54998.79,51248.79 ; pad.0@55059.45,51288.35 54998.79,51248.79 ; pad.0@55061.65,51290.55 55101.21,51351.21 ; pad.0@55064.36,51279.54 54998.79,51248.79 ; pad.0@55070.46,51285.64 55101.21,51351.21 ; R102.4@55129.77,51496.19 55150,51444.41 ; R102.2@55130.33,51403.64 55150,51455 ; R102.2@55133.86,51411.81 55103.79,51353.79 ; R102.4@55139.46,51498.99 55150,51444.41 ; R102.2@55140.04,51400.91 55150,51455 ; R102.2@55142.41,51406.51 55103.79,51353.79 ; R102.4@55150,51500 R102.2@55150,51400 ; R102.2@55156.51,51392.41 55103.79,51353.79 ; R102.2@55159.96,51400.91 55150,51455 ; R102.4@55160.54,51498.99 55150,51444.41 ; R102.2@55161.81,51383.86 55103.79,51353.79 ; R102.2@55169.67,51403.64 55150,51455 ; R102.4@55170.23,51496.19 55150,51444.41 ; 54850,51100 R102.2@55150,51400 ; 55103.79,51353.79 R102.2@55150,51400
  BottomLayer w10: J1.10@52300,51100 U1.10@52400,51100 52475,51100 52525,51050 v3(53050,51050) 52996,51050 ; J1.10@52301.77,51085.58 52359.53,51100 ; J1.10@52301.77,51114.42 52359.53,51100 ; J1.10@52305.05,51076 52359.53,51100 ; J1.10@52305.05,51124 52359.53,51100 ; U1.10@52394.46,51074.6 52339,51100 ; U1.10@52394.46,51125.4 52339,51100 ; U1.10@52397.9,51084.14 52339,51100 ; U1.10@52397.9,51115.86 52339,51100 ; U1.10@52399.7,51094.01 52339,51100 ; U1.10@52399.7,51105.99 52339,51100 ; U1.10@52400.3,51094.01 52461,51100 ; U1.10@52400.3,51105.99 52461,51100 ; U1.10@52402.1,51084.14 52461,51100 ; U1.10@52402.1,51115.86 52461,51100 ; U1.10@52405.54,51074.6 52461,51100 ; U1.10@52405.54,51125.4 52461,51100 ; v3@53047.92,51035.15 52996,51050 ; v3@53047.92,51064.85 52996,51050
P12: J1.11 J102.2 pad.0@54400,51000 U1.11 U101.9 | length 5449.3
  TopLayer w10: v3@53045,50950 v3(53050,50950) 54400,50950 ; v3@53052.08,50935.15 53104,50950 v3@53052.08,50964.85 ; pad.0@54380.4,50996 54400,50950 ; pad.0@54390.05,50999 54400,50950 ; pad.0@54400,51000 54400,50950 ; pad.0@54409.95,50999 54400,50950 ; pad.0@54419.6,50996 54400,50950 ; U101.9@54796.36,50980.33 54745,51000 ; U101.9@54796.36,51019.67 54745,51000 ; U101.9@54799.09,50990.04 54745,51000 ; U101.9@54799.09,51009.96 54745,51000 ; U101.9@54800.91,50990.04 54855,51000 ; U101.9@54800.91,51009.96 54855,51000 ; U101.9@54803.64,50980.33 54855,51000 ; U101.9@54803.64,51019.67 54855,51000 ; J102.2@55230.17,51310.22 55198.79,51248.79 ; J102.2@55238.8,51304.98 55198.79,51248.79 ; J102.2@55250,51295 55198.79,51248.79 ; J102.2@55250,51300 55100,51150 55100,51050 55050,51000 U101.9@54800,51000 54700,51000 54650,50950 54400,50950 ; J102.2@55258.78,51282.84 55198.79,51248.79 ; J102.2@55263.11,51273.71 55198.79,51248.79
  BottomLayer w10: J1.11@52300,51000 U1.11@52400,51000 52475,51000 52525,50950 v3@53045,50950 ; J1.11@52301.77,50985.58 52359.53,51000 ; J1.11@52301.77,51014.42 52359.53,51000 ; J1.11@52305.05,50976 52359.53,51000 ; J1.11@52305.05,51024 52359.53,51000 ; U1.11@52394.46,50974.6 52339,51000 ; U1.11@52394.46,51025.4 52339,51000 ; U1.11@52397.9,50984.14 52339,51000 ; U1.11@52397.9,51015.86 52339,51000 ; U1.11@52399.7,50994.01 52339,51000 ; U1.11@52399.7,51005.99 52339,51000 ; U1.11@52400.3,50994.01 52461,51000 ; U1.11@52400.3,51005.99 52461,51000 ; U1.11@52402.1,50984.14 52461,51000 ; U1.11@52402.1,51015.86 52461,51000 ; U1.11@52405.54,50974.6 52461,51000 ; U1.11@52405.54,51025.4 52461,51000 ; v3@53047.92,50935.15 52996,50950 ; v3@53047.92,50964.85 52996,50950 ; v3(53050,50950) 52996,50950
P13: J1.12 U1.12 | length 1002.6
  BottomLayer w20: J1.12@52298.05,50880.57 U1.12@52388.31,50881.32 ; J1.12@52298.05,50919.43 U1.12@52388.31,50918.68 ; J1.12@52302.13,50880.59 52389.53,50900 J1.12@52302.13,50919.41 ; J1.12@52306.08,50881.44 U1.12@52388.31,50918.68 ; J1.12@52306.08,50918.56 U1.12@52388.31,50881.32 ; U1.12@52397.58,50879.14 52309,50900 U1.12@52397.58,50920.86 ; U1.12@52400,50900 J1.12@52300,50900 ; J1.12@52300,50900 U1.12@52388.31,50881.32 ; J1.12@52300,50900 U1.12@52388.31,50918.68
P14: J1.13 U1.13 | length 1002.6
  BottomLayer w20: J1.13@52298.05,50780.57 U1.13@52388.31,50781.32 ; J1.13@52298.05,50819.43 U1.13@52388.31,50818.68 ; J1.13@52302.13,50780.59 52389.53,50800 J1.13@52302.13,50819.41 ; J1.13@52306.08,50781.44 U1.13@52388.31,50818.68 ; J1.13@52306.08,50818.56 U1.13@52388.31,50781.32 ; U1.13@52397.58,50779.14 52309,50800 U1.13@52397.58,50820.86 ; U1.13@52400,50800 J1.13@52300,50800 ; J1.13@52300,50800 U1.13@52388.31,50818.68 ; J1.13@52300,50800 U1.13@52388.31,50781.32
P15: J1.14 U1.14 | length 1002.6
  BottomLayer w20: J1.14@52298.05,50680.57 U1.14@52388.31,50681.32 ; J1.14@52298.05,50719.43 U1.14@52388.31,50718.68 ; J1.14@52302.13,50680.59 52389.53,50700 J1.14@52302.13,50719.41 ; J1.14@52306.08,50681.44 U1.14@52388.31,50718.68 ; J1.14@52306.08,50718.56 U1.14@52388.31,50681.32 ; U1.14@52397.58,50679.14 52309,50700 U1.14@52397.58,50720.86 ; U1.14@52400,50700 J1.14@52300,50700 ; J1.14@52300,50700 U1.14@52388.31,50718.68 ; J1.14@52300,50700 U1.14@52388.31,50681.32
P16: J1.15 U1.15 | length 1002.6
  BottomLayer w20: J1.15@52298.05,50580.57 U1.15@52388.31,50581.32 ; J1.15@52298.05,50619.43 U1.15@52388.31,50618.68 ; J1.15@52302.13,50580.59 52389.53,50600 J1.15@52302.13,50619.41 ; J1.15@52306.08,50581.44 U1.15@52388.31,50618.68 ; J1.15@52306.08,50618.56 U1.15@52388.31,50581.32 ; U1.15@52397.58,50579.14 52309,50600 U1.15@52397.58,50620.86 ; U1.15@52400,50600 J1.15@52300,50600 ; J1.15@52300,50600 U1.15@52388.31,50618.68 ; J1.15@52300,50600 U1.15@52388.31,50581.32
P17: J1.16 R8.2 R8.4 U1.16 | length 2990.2
  TopLayer w10: J1.16@52284.49,50519 52250,50475 ; J1.16@52291.87,50512.04 52250,50475 ; J1.16@52304.75,50486.27 52250,50475 ; J1.16@52305.89,50476.19 52250,50475 ; R8.2@52571.36,49880.33 52520,49900 ; R8.2@52571.36,49919.67 52520,49900 ; R8.2@52574.09,49890.04 52520,49900 ; R8.2@52574.09,49909.96 52520,49900 ; R8.2@52575.91,49890.04 52630,49900 ; R8.2@52575.91,49909.96 52630,49900 ; R8.2@52578.64,49880.33 52630,49900 ; R8.2@52578.64,49919.67 52630,49900 ; R8.4@52671.19,49879.77 52619.41,49900 ; R8.4@52671.19,49920.23 52619.41,49900 ; R8.4@52673.99,49889.46 52619.41,49900 ; R8.4@52673.99,49910.54 52619.41,49900 ; R8.4@52675,49900 52275,49900 52250,49925 52250,50475 ; 52250,50475 J1.16@52300,50500 52275,50500 52250,50475
  BottomLayer w20: J1.16@52298.05,50480.57 U1.16@52388.31,50481.32 ; J1.16@52298.05,50519.43 U1.16@52388.31,50518.68 ; J1.16@52302.13,50480.59 52389.53,50500 J1.16@52302.13,50519.41 ; J1.16@52306.08,50481.44 U1.16@52388.31,50518.68 ; J1.16@52306.08,50518.56 U1.16@52388.31,50481.32 ; U1.16@52397.58,50479.14 52309,50500 U1.16@52397.58,50520.86 ; U1.16@52400,50500 J1.16@52300,50500 ; J1.16@52300,50500 U1.16@52388.31,50481.32 ; J1.16@52300,50500 U1.16@52388.31,50518.68
P20: J2.9 U1.32 | length 704.1
  BottomLayer w10: U1.32@53000,51200 J2.9@53100,51200 ; U1.32@53000.3,51194.01 53061,51200 ; U1.32@53000.3,51205.99 53061,51200 ; U1.32@53002.1,51184.14 53061,51200 ; U1.32@53002.1,51215.86 53061,51200 ; U1.32@53005.54,51174.6 53061,51200 ; U1.32@53005.54,51225.4 53061,51200 ; J2.9@53094.95,51176 53040.47,51200 ; J2.9@53094.95,51224 53040.47,51200 ; J2.9@53098.23,51185.58 53040.47,51200 ; J2.9@53098.23,51214.42 53040.47,51200
P21: J2.8 U1.33 | length 704.1
  BottomLayer w10: U1.33@53000,51300 J2.8@53100,51300 ; U1.33@53000.3,51294.01 53061,51300 ; U1.33@53000.3,51305.99 53061,51300 ; U1.33@53002.1,51284.14 53061,51300 ; U1.33@53002.1,51315.86 53061,51300 ; U1.33@53005.54,51274.6 53061,51300 ; U1.33@53005.54,51325.4 53061,51300 ; J2.8@53094.95,51276 53040.47,51300 ; J2.8@53094.95,51324 53040.47,51300 ; J2.8@53098.23,51285.58 53040.47,51300 ; J2.8@53098.23,51314.42 53040.47,51300
P22: J2.7 U1.34 | length 704.1
  BottomLayer w10: U1.34@53000,51400 J2.7@53100,51400 ; U1.34@53000.3,51394.01 53061,51400 ; U1.34@53000.3,51405.99 53061,51400 ; U1.34@53002.1,51384.14 53061,51400 ; U1.34@53002.1,51415.86 53061,51400 ; U1.34@53005.54,51374.6 53061,51400 ; U1.34@53005.54,51425.4 53061,51400 ; J2.7@53094.95,51376 53040.47,51400 ; J2.7@53094.95,51424 53040.47,51400 ; J2.7@53098.23,51385.58 53040.47,51400 ; J2.7@53098.23,51414.42 53040.47,51400
P23: J2.6 U1.35 | length 704.1
  BottomLayer w10: U1.35@53000,51500 J2.6@53100,51500 ; U1.35@53000.3,51494.01 53061,51500 ; U1.35@53000.3,51505.99 53061,51500 ; U1.35@53002.1,51484.14 53061,51500 ; U1.35@53002.1,51515.86 53061,51500 ; U1.35@53005.54,51474.6 53061,51500 ; U1.35@53005.54,51525.4 53061,51500 ; J2.6@53094.95,51476 53040.47,51500 ; J2.6@53094.95,51524 53040.47,51500 ; J2.6@53098.23,51485.58 53040.47,51500 ; J2.6@53098.23,51514.42 53040.47,51500
P24: J2.5 U1.36 U2.6 | length 2453.3
  BottomLayer w10: U1.36@53000,51600 J2.5@53100,51600 53225,51725 53225,52625 53250,52650 ; U1.36@53000.3,51594.01 53061,51600 ; U1.36@53000.3,51605.99 53061,51600 ; U1.36@53002.1,51584.14 53061,51600 ; U1.36@53002.1,51615.86 53061,51600 ; U1.36@53005.54,51574.6 53061,51600 ; U1.36@53005.54,51625.4 53061,51600 ; J2.5@53085.88,51620.05 53150.74,51650.74 ; J2.5@53090.82,51611.26 53150.74,51650.74 ; J2.5@53094.95,51576 53040.47,51600 ; J2.5@53094.95,51624 53040.47,51600 ; J2.5@53098.23,51585.58 53040.47,51600 ; J2.5@53098.23,51614.42 53040.47,51600 ; J2.5@53111.26,51590.82 53150.74,51650.74 ; J2.5@53120.05,51585.88 53150.74,51650.74 ; U2.6@53293.24,52624.89 53250,52650 ; U2.6@53293.24,52675.11 53250,52650 ; U2.6@53297.44,52634.21 53250,52650 ; U2.6@53297.44,52665.79 53250,52650 ; U2.6@53299.64,52644.01 53250,52650 ; U2.6@53299.64,52655.99 53250,52650 ; U2.6@53300,52650 53250,52650
P25: J2.4 U1.37 U2.5 | length 2593.4
  BottomLayer w10: U1.37@53000,51700 J2.4@53100,51700 ; U1.37@53000.3,51694.01 53061,51700 ; U1.37@53000.3,51705.99 53061,51700 ; U1.37@53002.1,51684.14 53061,51700 ; U1.37@53002.1,51715.86 53061,51700 ; U1.37@53005.54,51674.6 53061,51700 ; U1.37@53005.54,51725.4 53061,51700 ; J2.4@53085.88,51720.05 53150.74,51750.74 ; J2.4@53090.82,51711.26 53150.74,51750.74 ; J2.4@53094.95,51676 53040.47,51700 ; J2.4@53094.95,51724 53040.47,51700 ; J2.4@53098.23,51685.58 53040.47,51700 ; J2.4@53098.23,51714.42 53040.47,51700 ; J2.4@53111.26,51690.82 53150.74,51750.74 ; J2.4@53120.05,51685.88 53150.74,51750.74 ; U2.5@53294.46,52724.6 53239,52750 ; U2.5@53294.46,52775.4 53239,52750 ; U2.5@53297.9,52734.14 53239,52750 ; U2.5@53297.9,52765.86 53239,52750 ; U2.5@53299.7,52744.01 53239,52750 ; U2.5@53299.7,52755.99 53239,52750 ; U2.5@53300,52750 53225,52750 53200,52725 53200,51800 J2.4@53100,51700 ; 53040.47,51700 J2.4@53100,51700
P26: J2.3 U1.38 U2.4 | length 2550.3
  BottomLayer w10: U1.38@53000,51800 J2.3@53100,51800 ; U1.38@53000.3,51794.01 53061,51800 ; U1.38@53000.3,51805.99 53061,51800 ; U1.38@53002.1,51784.14 53061,51800 ; U1.38@53002.1,51815.86 53061,51800 ; U1.38@53005.54,51774.6 53061,51800 ; U1.38@53005.54,51825.4 53061,51800 ; J2.3@53094.95,51776 53040.47,51800 ; J2.3@53094.95,51824 53040.47,51800 ; J2.3@53098.23,51785.58 53040.47,51800 ; J2.3@53098.23,51814.42 53040.47,51800 ; J2.3@53102.11,51785.63 53150,51800 ; J2.3@53102.11,51814.37 53150,51800 ; J2.3@53106.02,51776.22 53150,51800 ; J2.3@53106.02,51823.78 53150,51800 ; U2.4@53294.46,52824.6 53239,52850 ; U2.4@53294.46,52875.4 53239,52850 ; U2.4@53297.9,52834.14 53239,52850 ; U2.4@53297.9,52865.86 53239,52850 ; U2.4@53299.7,52844.01 53239,52850 ; U2.4@53299.7,52855.99 53239,52850 ; U2.4@53300,52850 53200,52850 53175,52825 53175,51825 53150,51800 ; 53040.47,51800 J2.3@53100,51800 ; J2.3@53100,51800 53150,51800